# Altium PCB MXT2088.PcbDoc
Units mil, origin at the board's own origin, x right, y up, seen from the top; angles counter-clockwise.
Board outline 1862 x 1669 mil, 2 copper layers (Top Layer, Bottom Layer); 8 components, 30 nets, 91 pads, 28 vias.
Unrouted connection lines stored in the file: 7.
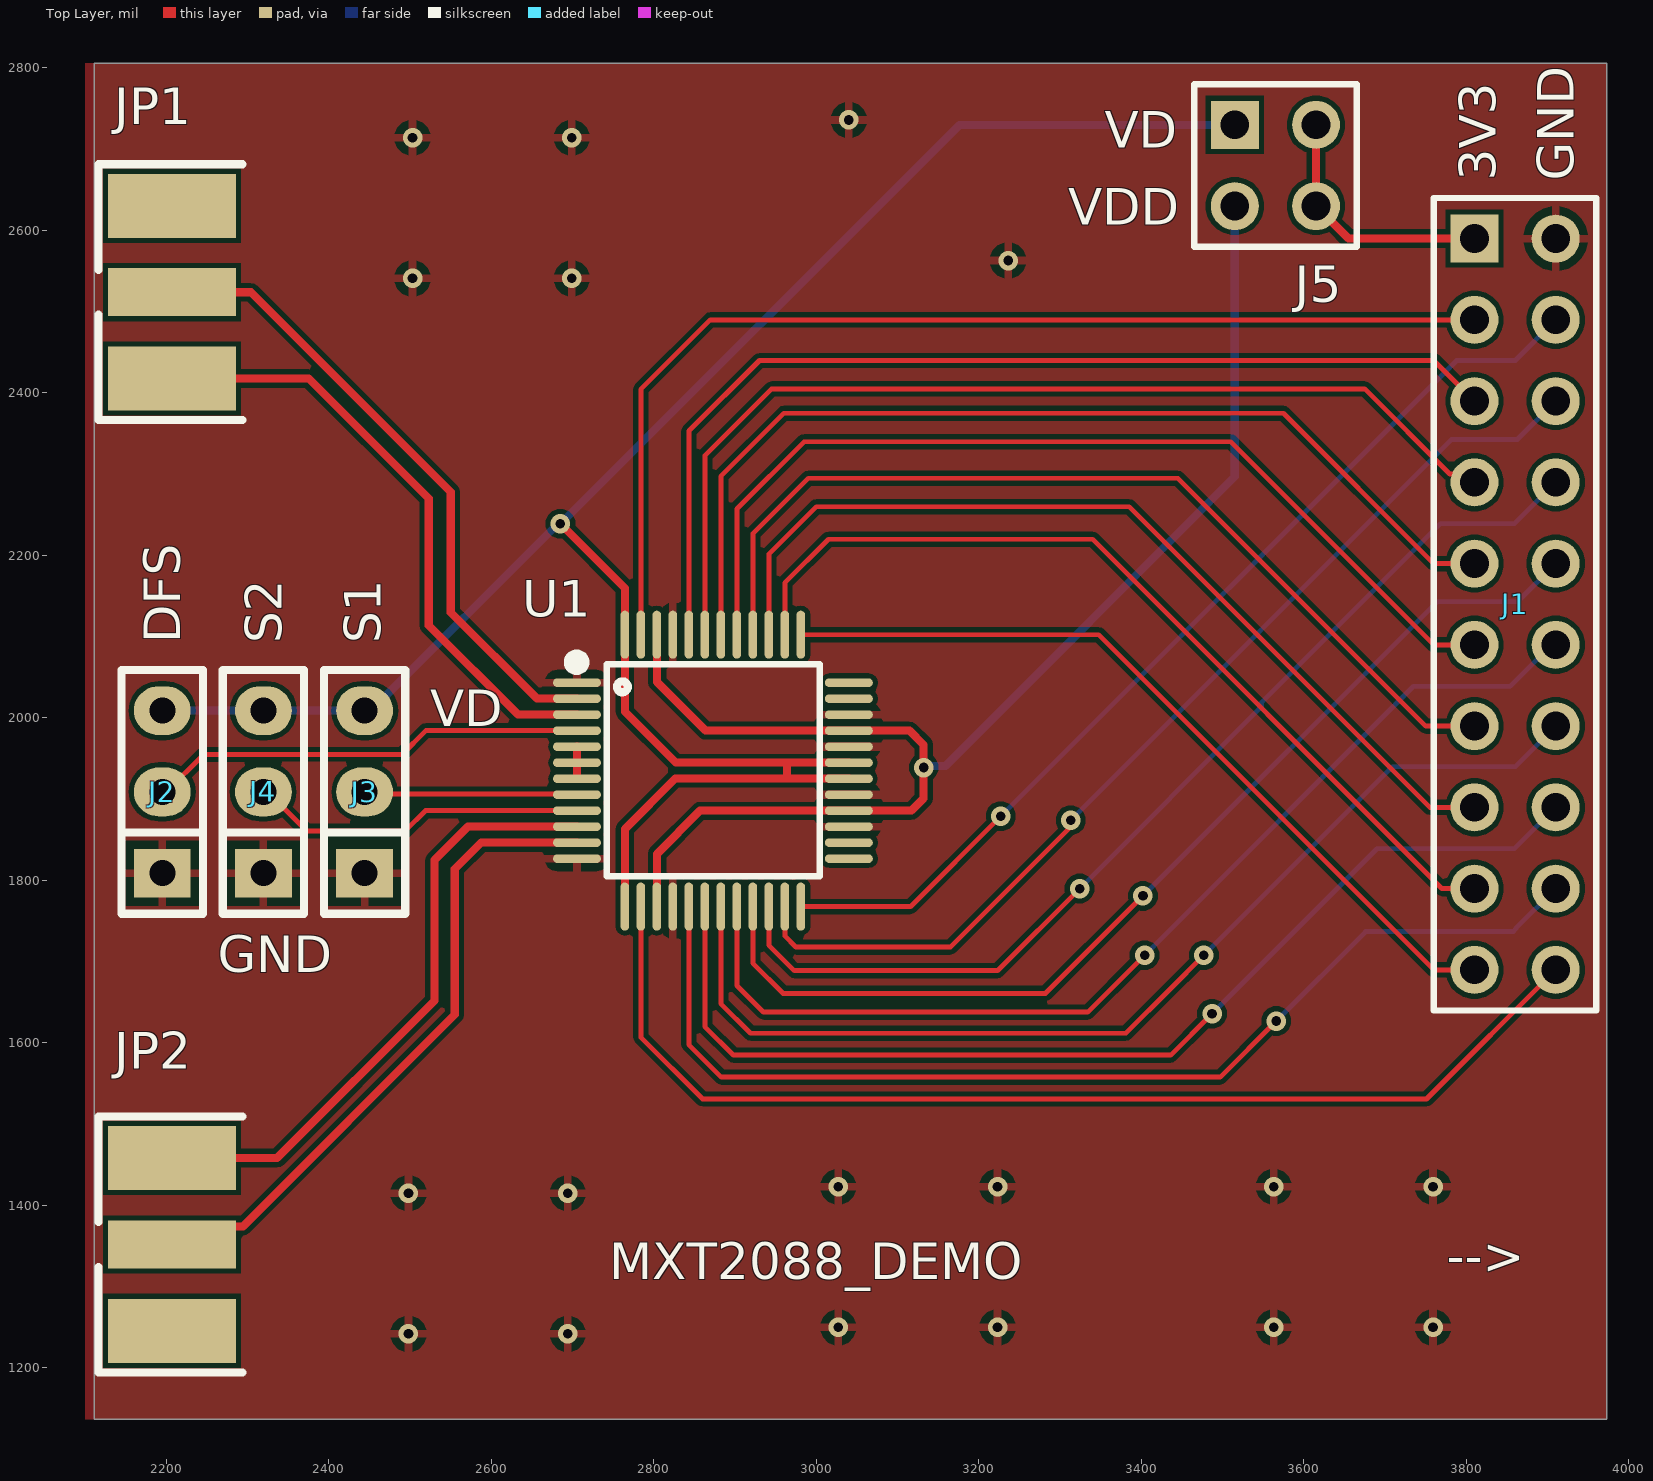
[diagram p0: Top Layer view]
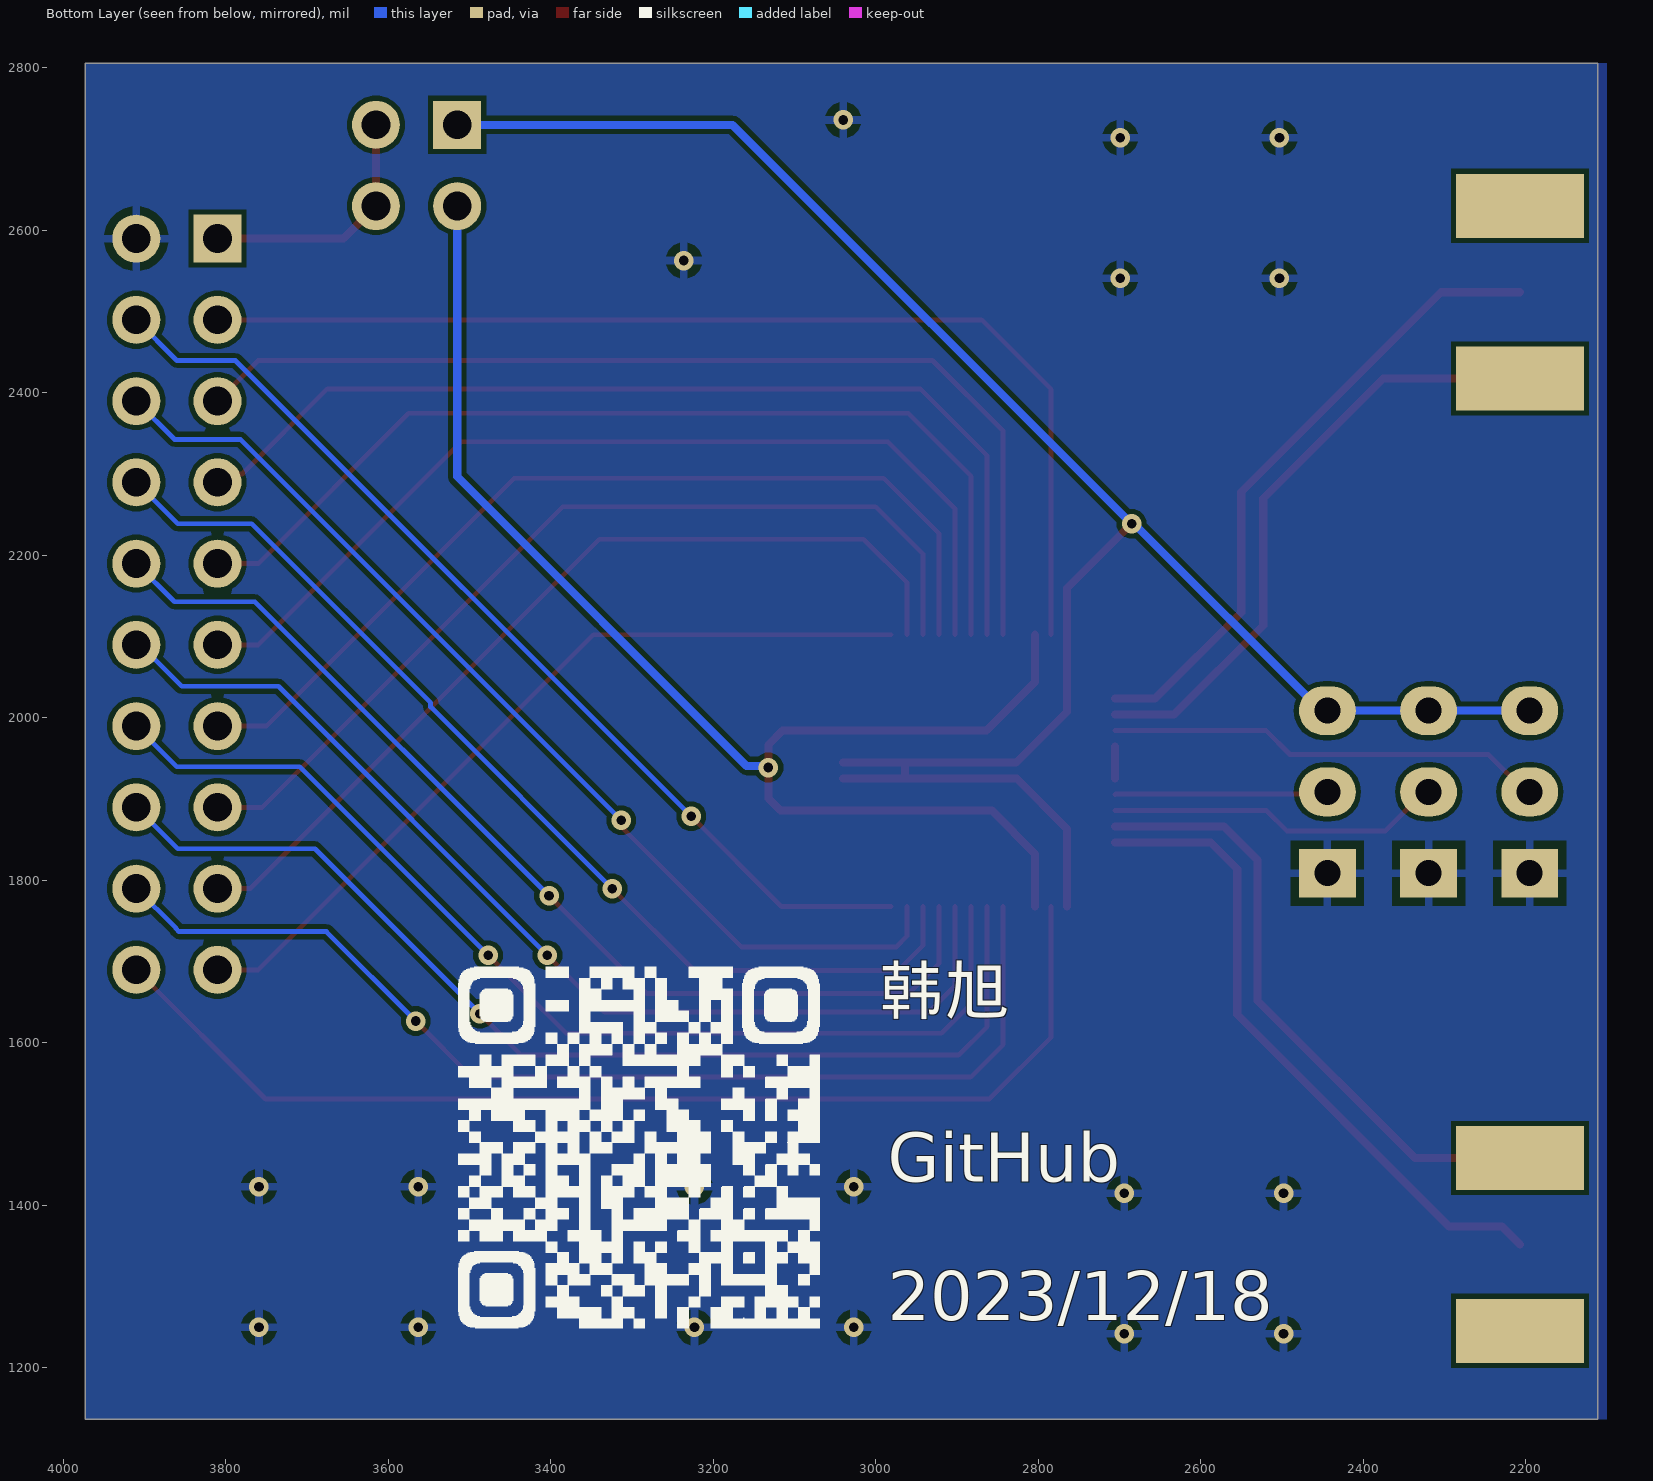
[diagram p1: Bottom Layer view, seen from below]

## Layer stack, top to bottom
Top Solder: solder mask 0.4, Solder Resist, Dk 3.5
Top Layer: signal copper 1.4
Dielectric 1: dielectric 12.6, FR-4, Dk 4.8
Bottom Layer: signal copper 1.4
Bottom Solder: solder mask 0.4, Solder Resist, Dk 3.5

## Board outline
2111,1137 2111,2806 3973,2806 3973,1137

## Design rules (kind name [scope] priority, off if disabled: settings)
Clearance [All] p1: gap=6 ignorepadtopadclearanceinfootprint=TRUE except(0: Arc-Hole Track-Hole SMDPad-Hole THPad-Hole Via-Hole Fill-Hole Poly-Hole Region-Hole Text-Hole)
PolygonConnect [All] p1: connectstyle=Relief reliefconductorwidth=10 reliefentries=4 polygonreliefangle="90 Angle" airgapwidth=10
RoutingVias [All] p1: holewidth=12 width=24 viastyle="Through Hole" minholewidth=12 minwidth=24 maxholewidth=28 maxwidth=50
SolderMaskExpansion [All] p1: expansion=4 istentingtop=FALSE
Width [All] p1: maxlimit=100 minlimit=6 preferedwidth=10 minimp=50.000000 maximp=50.000000 favimp=50.000000
30 further rules are at their usual default settings.

## Classes and differential pairs
component class MXT2088: J2 J3 J4 J5 JP1 JP2 U1

## Components (designator, comment, footprint, x,y, rotation, side; value= is the part's Value field where it differs from the comment)
J1 "Pin HDR2X10" "Pin HDR2X10/2.54mm-S" 3810,2590 r270 top
J2 "Pin HDR1X3" "Pin HDR1X3/2.54mm-S" 2195,1809 r180 top
J3 "Pin HDR1X3" "Pin HDR1X3/2.54mm-S" 2444,1809 r180 top
J4 "Pin HDR1X3" "Pin HDR1X3/2.54mm-S" 2319.5,1809 r180 top
J5 "Pin HDR2X2" "Pin HDR2X2/2.54mm-S" 3515,2730 r270 top
JP1 "SMA" SMA-KE 2207,2524 r90 top
JP2 "SMA" SMA-KE 2207,1352 r90 top
U1 "AD9288BSTZ-40" LQFP-48_L7.0-W7.0-P0.50-LS9.0-BL 2872.68,1935.16 r270 top

## Footprints (in the part's own frame and the unit in brackets; to place one, negate y for a bottom-side part, rotate by r counter-clockwise, add the part's x,y. Pads: shape width x height; smd on the part's side, far side on the other; paste and mask are expansions set on the pad)
LQFP-48_L7.0-W7.0-P0.50-LS9.0-BL [mm]
  oval 0.27x1.5 smd paste+0 mask+0.05: 1(-2.75,-4.25) 2(-2.25,-4.25) 3(-1.75,-4.25) 4(-1.25,-4.25) 5(-0.75,-4.25) 6(-0.25,-4.25) 7(0.25,-4.25) 8(0.75,-4.25) 9(1.25,-4.25) 10(1.75,-4.25) 11(2.25,-4.25) 12(2.75,-4.25) 25(2.75,4.25) 26(2.25,4.25) 27(1.75,4.25) 28(1.25,4.25) 29(0.75,4.25) 30(0.25,4.25) 31(-0.25,4.25) 32(-0.75,4.25) 33(-1.25,4.25) 34(-1.75,4.25) 35(-2.25,4.25) 36(-2.75,4.25)
  oval 1.5x0.27 smd paste+0 mask+0.05: 13(4.25,-2.75) 14(4.25,-2.25) 15(4.25,-1.75) 16(4.25,-1.25) 17(4.25,-0.75) 18(4.25,-0.25) 19(4.25,0.25) 20(4.25,0.75) 21(4.25,1.25) 22(4.25,1.75) 23(4.25,2.25) 24(4.25,2.75) 37(-4.25,2.75) 38(-4.25,2.25) 39(-4.25,1.75) 40(-4.25,1.25) 41(-4.25,0.75) 42(-4.25,0.25) 43(-4.25,-0.25) 44(-4.25,-0.75) 45(-4.25,-1.25) 46(-4.25,-1.75) 47(-4.25,-2.25) 48(-4.25,-2.75)
  silkscreen extent -3.59,-4.46 3.3,3.34
"Pin HDR1X3/2.54mm-S" [mil]
  rect 70x60 hole 32: 1(0,0)
  oval 70x60 hole 32: 2(0,-100) 3(0,-200)
  silkscreen extent -50,-250 50,50, body extent -50,-250 50,50, height 336
"Pin HDR2X2/2.54mm-S" [mm] "Connector; Header; 2x2 Position"
  rect 1.5x1.5 hole 0.9: 1(0,0)
  round 1.5 hole 0.9: 2(0,2.54) 3(2.54,0) 4(2.54,2.54)
  silkscreen extent -1.27,-1.27 3.81,3.81, body extent -1.27,-1.27 3.81,3.81, height 7.58
"Pin HDR2X10/2.54mm-S" [mm] "Connector; Header; 10x2 Position"
  rect 1.5x1.5 hole 0.9: 1(0,0)
  round 1.5 hole 0.9: 2(0,2.54) 3(2.54,0) 4(2.54,2.54) 5(5.08,0) 6(5.08,2.54) 7(7.62,0) 8(7.62,2.54) 9(10.16,0) 10(10.16,2.54) 11(12.7,0) 12(12.7,2.54) 13(15.24,0) 14(15.24,2.54) 15(17.78,0) 16(17.78,2.54) 17(20.32,0) 18(20.32,2.54) 19(22.86,0) 20(22.86,2.54)
  silkscreen extent -1.27,-1.27 24.13,3.81, body extent -1.27,-1.27 24.13,3.81, height 7.58
SMA-KE [mm] "SMA 偏脚射频天线座"
  rect 1.5x4 smd: 1(0,0)
  rect 2x4 smd: 2(-2.7,0) 2(2.7,0)
  rect 2x4 smd far side: 3(-2.7,0) 3(2.7,0)
  silkscreen extent -4,-2.2 4,2.3, body extent -3.25,-1.3 3.25,12.2, height 3.75

## Part data
JP1 JP2: "SMA-2.4G射频天线接口", BOM名称=SMA-2.4G射频天线接口, 学习资源=www.ooocke.com, 版权归属=源创客
U1: JLCPCB Part Class="Extended Part", Manufacturer=ADI(亚德诺), Operating Temperature=-40℃~+85℃, sampling frequency=40MHz, Supply Voltage=2.7V~3.6V, Add into BOM=yes, Convert to PCB=yes, Datasheet=https://atta.szlcsc.com/upload/public/pdf/source/20140508/1457707057464.pdf, Device=AD9288BSTZ-40, differential input=是, Interface=并行, LCSC Part Name=AD9288BSTZ-40, Manufacturer Part=AD9288BSTZ-40, Name=AD9288BSTZ-40, number of channels=2, resolution=8位, Supplier=LCSC, Supplier Footprint=LQFP-48(7x7), Supplier Part=C653455, Symbol=AD9288BSTZ-40

## Via types
v1: diameter 24, hole 11.81, Top Layer to Bottom Layer, tented both sides, 28 vias

## Nets (pads, with @x,y where several pads share a name; then routed paths per layer and width w, separated by ;. In a path a pad name is that pad's centre, name@x,y a point inside that pad or via, vN(x,y) a via of type N, cw(c..) or ccw(c..) an arc to the next point about the centre after c; other vN are vias at no path point)
3V3: J1.1 J5.2 J5.4 | length 311.6
  Top Layer w10: J5.2 J5.4 3655,2590 J1.1
AINN: JP1.2 JP1.3 U1.3 | length 761.1
  Top Layer w10: JP1.2@2207,2417.7 2375.3,2417.7 2523,2270 2523,2114 2632.94,2004.06 U1.3
AINP: JP1.1 U1.2 | length 792.3
  Top Layer w10: JP1.1 2304,2524 2550,2278 2550,2130 2656.26,2023.74 U1.2
BINN: JP2.2 JP2.3 U1.10 | length 768.7
  Top Layer w10: JP2.2@2207,1458.3 2336.3,1458.3 2530,1652 2530,1825 2571.26,1866.26 U1.10
BINP: JP2.1 U1.11 | length 808.1
  Top Layer w10: JP2.1 2229.24,1374.24 2294.24,1374.24 2555,1635 2555,1814 2587.58,1846.58 U1.11
DA0: J1.19 U1.37 | length 999.9
  Top Layer w6: U1.37 3347.52,2102.48 3760,1690 J1.19
DA1: J1.17 U1.38 | length 1112.9
  Top Layer w6: U1.38 2961.26,2166.26 3015,2220 3340,2220 3770,1790 J1.17
DA2: J1.15 U1.39 | length 1145
  Top Layer w6: U1.39 2941.58,2201.58 3000,2260 3385,2260 3755,1890 J1.15
DA3: J1.13 U1.40 | length 1167.1
  Top Layer w6: U1.40 2921.89,2226.89 2990,2295 3445,2295 3750,1990 J1.13
DA4: J1.11 U1.41 | length 1200.4
  Top Layer w6: U1.41 2902.21,2257.21 2985,2340 3510,2340 3760,2090 J1.11
DA5: J1.9 U1.42 | length 1231.2
  Top Layer w6: U1.42 2882.52,2297.52 2960,2375 3575,2375 3760,2190 J1.9
DA6: J1.7 U1.43 | length 1249.2
  Top Layer w6: U1.43 2862.84,2322.84 2945,2405 3675,2405 3779.85,2300.15 3799.85,2300.15 J1.7
DA7: J1.5 U1.44 | length 1274.2
  Top Layer w6: U1.44 2843.15,2353.15 2930,2440 3760,2440 J1.5
DB0: J1.4 U1.24 | length 1228.2
  Top Layer w6: U1.24 3115.84,1767.84 v1(3227,1879)
  Bottom Layer w6: v1(3227,1879) 3788,2440 3860,2440 J1.4
DB1: J1.6 U1.23 | length 1273.6
  Top Layer w6: U1.23 2961.26,1731.74 2975,1718 3165,1718 3309.56,1862.56 3309.56,1870.56 v1(3313,1874)
  Bottom Layer w6: v1(3313,1874) 3781.9,2342.9 3862.9,2342.9 J1.6
DB2: J1.8 U1.22 | length 1280.7
  Top Layer w6: U1.22 2941.58,1720.42 2973,1689 3223,1689 v1(3324,1790)
  Bottom Layer w6: v1(3324,1790) 3547.72,2013.72 3547.72,2018.72 3768,2239 3859,2239 J1.8
DB3: J1.10 U1.21 | length 1292.3
  Top Layer w6: U1.21 2921.89,1698.11 2959,1661 3282,1661 v1(3402,1781)
  Bottom Layer w6: v1(3402,1781) 3764,2143 3863,2143 J1.10
DB4: J1.12 U1.20 | length 1305.6
  Top Layer w6: U1.20 2902.21,1670.79 2935,1638 3334,1638 v1(3404,1708)
  Bottom Layer w6: v1(3404,1708) 3735,2039 3854,2039 3905,2090 J1.12
DB5: J1.14 U1.19 | length 1318.5
  Top Layer w6: U1.19 2882.52,1648.48 2919,1612 3381,1612 3435.28,1666.28 v1(3477,1708)
  Bottom Layer w6: v1(3477,1708) 3709,1940 3860,1940 J1.14
DB6: J1.16 U1.18 | length 1335.7
  Top Layer w6: U1.18 2862.84,1620.16 2898,1585 3436,1585 v1(3487,1636)
  Bottom Layer w6: v1(3487,1636) 3690,1839 3859,1839 J1.16
DB7: J1.18 U1.17 | length 1349.7
  Top Layer w6: U1.17 2843.15,1597.85 2883,1558 3497,1558 v1(3566,1627)
  Bottom Layer w6: v1(3566,1627) 3676,1737 3857.49,1737 3861,1740.51 3861,1741 J1.18
DFS: J2.2 U1.4 | length 541.6
  Top Layer w6: J2.2 2200,1909 2246,1955 2490,1955 2519.37,1984.37 U1.4
ENCA: J1.3 U1.47 | length 1363.4
  Top Layer w6: U1.47 2784.1,2404.61 2869.49,2490 J1.3
ENCB: J1.20 U1.14 | length 1384.1
  Top Layer w6: U1.14 2784.1,1606.9 2860,1531 3751,1531 J1.20
GND: J1.2 J2.1 J3.1 J4.1 U1.1 U1.12 U1.16 U1.27 U1.29 U1.32 U1.34 U1.45
  other v1: 2498,1242 2694,1242 3027,1250 3223,1250 3563,1250 3759,1250 2498,1415 2694,1415 3027,1423 3223,1423 3563,1423 3759,1423 2503,2541 2699,2541 3236,2563 2503,2714 2699,2714 3040,2736
NetU1_5: U1.5 U1.6 U1.7 | length 39.4
  Top Layer w10: U1.7 U1.6 U1.5
S1: J3.2 U1.8 | length 262.8
  Top Layer w6: J3.2 2446.48,1906.52 2704.47,1906.52 U1.8
S2: J4.2 U1.9 | length 416.1
  Top Layer w6: J4.2 2324.5,1909 2372.5,1861 2494,1861 2518.95,1885.95 U1.9
VD: J2.3 J3.3 J4.3 J5.1 U1.13 U1.30 U1.31 U1.48 | length 2601.8
  Top Layer w10: v1(2685,2239) 2764.41,2159.59 2764.41,2007.59 2827,1945 2964,1945 ; U1.13 2764.41,1863.41 2826.32,1925.32 2966,1925.32 ; U1.30 2966,1925.32 ; U1.31 2964,1945 ; 2964,1945 2964,1927.32 2966,1925.32
  Bottom Layer w10: J2.3 J4.3 2452,2009 2682,2239 v1(2685,2239) 3176,2730 J5.1
VDD: J5.3 U1.15 U1.28 U1.33 U1.46 | length 1770.2
  Top Layer w10: U1.15 2803.78,1832.78 2856.95,1885.95 U1.28 3116.95,1885.95 3132,1901 3132,1967 3114.63,1984.37 U1.33 2863.63,1984.37 2803.78,2044.22 U1.46
  Bottom Layer w10: v1(3132,1939) 3134,1941 3159,1941 3515,2297 J5.3
pads on no net: U1.25 U1.26 U1.35 U1.36

## Polygon pours and split planes (outlines as drawn)
GND on Top Layer "NONET_L01_P-001" (solid, pour order 0): 2100,2806 3973,2806 3973,1137 2100,1137
GND on Bottom Layer "NONET_L01_P-001" (solid, pour order 1): 2100,2806 3973,2806 3973,1137 2100,1137

## Silkscreen, mask and mechanical layers (free items; w line width, h text height)
Top Overlay:
  text "VD" at 3354.99,2702 h45
  text "3V3" at 3836,2661 h45 r90
  text "GND" at 3932,2661 h45 r90
  text "VDD" at 3310,2607 h45
  text "DFS" at 2217,2092 h45 r90
  text "S2" at 2342,2092 h45 r90
  text "S1" at 2464,2092 h45 r90
  text "VD" at 2525,1990 h45
  text "GND" at 2263,1687 h45
  text "-->" at 3776,1316 h45
  text "MXT2088_DEMO" at 2745,1309.5 h45
Bottom Overlay:
  drawing of 3775 lines, arcs and shapes, not listed
  text "韩旭" at 2994.95,1617.75 h100
  text "GitHub" at 2985,1429 h60
  text "2023/12/18" at 2985,1259 h60
Mechanical 1:
  the board outline again, w10